# EAGLE board Schematic_1 (EAGLE 9.4.2)

Size 160 x 100 mm. Coordinates in mm from the lower left corner, seen from the top.
Outline: 0,0 160,0 160,100 0,100 0,0
Copper layers (1*16): Top 0.035mm / dielectric 1.5mm / Bottom 0.035mm
Design rules "default": minimum track width 6mil, minimum drill 0.35mm, track to track 6mil, track to pad 6mil, pad to pad 6mil, via to via 6mil, smd to smd 6mil, copper to edge 40mil, drill to drill 6mil, minimum pad ring 10mil, minimum via ring 8mil, stop-mask expansion 4mil, vias tented up to drill 0mil, thermal gap 10mil

## Footprints (pad centres in the part's own frame; a part is rotated, then mirrored left to right if it is on the bottom)
C2.5-3 = drill 0.813 pad 1.6 octagon: 1 -1.27,0; 2 1.27,0
SOD80C = smd 1.4 x 1.8: A 1.7,0; C -1.7,0
GCT_USB4085-GF-A_REVA = drill 0.4 pad 0.65: A1 -2.975,4.025; A4 -2.125,4.025; A5 -1.275,4.025; A6 -0.425,4.025; A7 0.425,4.025; A8 1.275,4.025; A9 2.125,4.025; A12 2.975,4.025; B1 2.975,2.675; B4 2.125,2.675; B5 1.275,2.675; B6 0.425,2.675; B7 -0.425,2.675; B8 -1.275,2.675; B9 -2.125,2.675; B12 -2.975,2.675 | drill 0.6 long: P1 -4.325,3.045; P2 4.325,3.045; P3 4.325,-0.335; P4 -4.325,-0.335
LQFP48-7X7MM = smd 1.194 x 0.305: 1 -4.25,2.75; 2 -4.25,2.25; 3 -4.25,1.75; 4 -4.25,1.25; 5 -4.25,0.75; 6 -4.25,0.25; 7 -4.25,-0.25; 8 -4.25,-0.75; 9 -4.25,-1.25; 10 -4.25,-1.75; 11 -4.25,-2.25; 12 -4.25,-2.75; 25 4.25,-2.75; 26 4.25,-2.25; 27 4.25,-1.75; 28 4.25,-1.25; 29 4.25,-0.75; 30 4.25,-0.25; 31 4.25,0.25; 32 4.25,0.75; 33 4.25,1.25; 34 4.25,1.75; 35 4.25,2.25; 36 4.25,2.75 | smd 0.305 x 1.194: 13 -2.75,-4.25; 14 -2.25,-4.25; 15 -1.75,-4.25; 16 -1.25,-4.25; 17 -0.75,-4.25; 18 -0.25,-4.25; 19 0.25,-4.25; 20 0.75,-4.25; 21 1.25,-4.25; 22 1.75,-4.25; 23 2.25,-4.25; 24 2.75,-4.25; 37 2.75,4.25; 38 2.25,4.25; 39 1.75,4.25; 40 1.25,4.25; 41 0.75,4.25; 42 0.25,4.25; 43 -0.25,4.25; 44 -0.75,4.25; 45 -1.25,4.25; 46 -1.75,4.25; 47 -2.25,4.25; 48 -2.75,4.25
CHERRY-MX-LED = drill 1.016 pad 1.778: LED+ -1.27,-5.08; LED- 1.27,-5.08 | drill 1.714 pad 1.93: P$3 -5.08,0; P$4 5.08,0 | drill 1.524 pad 2.286: SW1 -3.81,2.54; SW2 2.54,5.08 | hole 4.064: 0,0

## Placement (x,y rotation side)
C1  100 nF  [C2.5-3]  -96.52,-373.38 0 top  (outside the outline)
C2  100 nF  [C2.5-3]  -96.52,-379.73 0 top  (outside the outline)
C3  4.7 mF  [C2.5-3]  -96.52,-386.08 0 top  (outside the outline)
C4  100 nF  [C2.5-3]  -96.52,-393.7 0 top  (outside the outline)
C5  4.7 mF  [C2.5-3]  -96.52,-401.32 0 top  (outside the outline)
C6  10 nF  [C2.5-3]  -96.52,-408.94 0 top  (outside the outline)
C7  1 mF  [C2.5-3]  -96.52,-416.56 0 top  (outside the outline)
D1  [SOD80C]  -96.52,-15.24 0 top  (outside the outline)
D2  [SOD80C]  -96.52,-20.32 0 top  (outside the outline)
D3  [SOD80C]  -96.52,-25.4 0 top  (outside the outline)
D4  [SOD80C]  -96.52,-30.48 0 top  (outside the outline)
D5  [SOD80C]  -96.52,-53.34 0 top  (outside the outline)
D6  [SOD80C]  -96.52,-76.2 0 top  (outside the outline)
D7  [SOD80C]  -63.5,-116.84 0 top  (outside the outline)
D8  [SOD80C]  -58.42,-116.84 0 top  (outside the outline)
D9  [SOD80C]  -96.52,-134.62 0 top  (outside the outline)
D10  [SOD80C]  -91.44,-134.62 0 top  (outside the outline)
D11  [SOD80C]  -86.36,-134.62 0 top  (outside the outline)
D12  [SOD80C]  -81.28,-134.62 0 top  (outside the outline)
D13  [SOD80C]  -63.5,-175.26 0 top  (outside the outline)
D14  [SOD80C]  -58.42,-175.26 0 top  (outside the outline)
D15  [SOD80C]  -96.52,-193.04 0 top  (outside the outline)
D16  [SOD80C]  -91.44,-193.04 0 top  (outside the outline)
D17  [SOD80C]  -86.36,-193.04 0 top  (outside the outline)
D18  [SOD80C]  -81.28,-193.04 0 top  (outside the outline)
D19  [SOD80C]  -63.5,-233.68 0 top  (outside the outline)
D20  [SOD80C]  -58.42,-233.68 0 top  (outside the outline)
D21  [SOD80C]  -96.52,-251.46 0 top  (outside the outline)
D22  [SOD80C]  -91.44,-251.46 0 top  (outside the outline)
D23  [SOD80C]  -86.36,-251.46 0 top  (outside the outline)
D24  [SOD80C]  -81.28,-251.46 0 top  (outside the outline)
D25  [SOD80C]  -63.5,-292.1 0 top  (outside the outline)
D26  [SOD80C]  -58.42,-292.1 0 top  (outside the outline)
D27  [SOD80C]  -96.52,-309.88 0 top  (outside the outline)
D28  [SOD80C]  -91.44,-309.88 0 top  (outside the outline)
D29  [SOD80C]  -86.36,-309.88 0 top  (outside the outline)
D30  [SOD80C]  -81.28,-309.88 0 top  (outside the outline)
D31  [SOD80C]  -63.5,-350.52 0 top  (outside the outline)
D32  [SOD80C]  -58.42,-350.52 0 top  (outside the outline)
D33  [SOD80C]  -96.52,-368.3 0 top  (outside the outline)
D34  [SOD80C]  -91.44,-368.3 0 top  (outside the outline)
D35  [SOD80C]  -86.36,-368.3 0 top  (outside the outline)
D36  [SOD80C]  -81.28,-368.3 0 top  (outside the outline)
J1  USB4085-GF-A_REVA  [GCT_USB4085-GF-A_REVA]  -27.94,7.62 0 top  (outside the outline)
U1  STM32F0XXC2T  [LQFP48-7X7MM]  -26.67,-6.35 0 top  (outside the outline)
U$1  CHERRY-MX-LED  [CHERRY-MX-LED]  -41.91,-3.81 0 top  (outside the outline)
U$2  CHERRY-MX-LED  [CHERRY-MX-LED]  -58.42,-3.81 0 top  (outside the outline)
U$3  CHERRY-MX-LED  [CHERRY-MX-LED]  -74.93,-3.81 0 top  (outside the outline)
U$4  CHERRY-MX-LED  [CHERRY-MX-LED]  -91.44,-3.81 0 top  (outside the outline)
U$5  CHERRY-MX-LED  [CHERRY-MX-LED]  -91.44,-41.91 0 top  (outside the outline)
U$6  CHERRY-MX-LED  [CHERRY-MX-LED]  -91.44,-64.77 0 top  (outside the outline)
U$7  CHERRY-MX-LED  [CHERRY-MX-LED]  -91.44,-87.63 0 top  (outside the outline)
U$8  CHERRY-MX-LED  [CHERRY-MX-LED]  -74.93,-87.63 0 top  (outside the outline)
U$9  CHERRY-MX-LED  [CHERRY-MX-LED]  -91.44,-105.41 0 top  (outside the outline)
U$10  CHERRY-MX-LED  [CHERRY-MX-LED]  -74.93,-105.41 0 top  (outside the outline)
U$11  CHERRY-MX-LED  [CHERRY-MX-LED]  -91.44,-123.19 0 top  (outside the outline)
U$12  CHERRY-MX-LED  [CHERRY-MX-LED]  -74.93,-123.19 0 top  (outside the outline)
U$13  CHERRY-MX-LED  [CHERRY-MX-LED]  -91.44,-146.05 0 top  (outside the outline)
U$14  CHERRY-MX-LED  [CHERRY-MX-LED]  -74.93,-146.05 0 top  (outside the outline)
U$15  CHERRY-MX-LED  [CHERRY-MX-LED]  -91.44,-163.83 0 top  (outside the outline)
U$16  CHERRY-MX-LED  [CHERRY-MX-LED]  -74.93,-163.83 0 top  (outside the outline)
U$17  CHERRY-MX-LED  [CHERRY-MX-LED]  -91.44,-181.61 0 top  (outside the outline)
U$18  CHERRY-MX-LED  [CHERRY-MX-LED]  -74.93,-181.61 0 top  (outside the outline)
U$19  CHERRY-MX-LED  [CHERRY-MX-LED]  -91.44,-204.47 0 top  (outside the outline)
U$20  CHERRY-MX-LED  [CHERRY-MX-LED]  -74.93,-204.47 0 top  (outside the outline)
U$21  CHERRY-MX-LED  [CHERRY-MX-LED]  -91.44,-222.25 0 top  (outside the outline)
U$22  CHERRY-MX-LED  [CHERRY-MX-LED]  -74.93,-222.25 0 top  (outside the outline)
U$23  CHERRY-MX-LED  [CHERRY-MX-LED]  -91.44,-240.03 0 top  (outside the outline)
U$24  CHERRY-MX-LED  [CHERRY-MX-LED]  -74.93,-240.03 0 top  (outside the outline)
U$25  CHERRY-MX-LED  [CHERRY-MX-LED]  -91.44,-262.89 0 top  (outside the outline)
U$26  CHERRY-MX-LED  [CHERRY-MX-LED]  -74.93,-262.89 0 top  (outside the outline)
U$27  CHERRY-MX-LED  [CHERRY-MX-LED]  -91.44,-280.67 0 top  (outside the outline)
U$28  CHERRY-MX-LED  [CHERRY-MX-LED]  -74.93,-280.67 0 top  (outside the outline)
U$29  CHERRY-MX-LED  [CHERRY-MX-LED]  -91.44,-298.45 0 top  (outside the outline)
U$30  CHERRY-MX-LED  [CHERRY-MX-LED]  -74.93,-298.45 0 top  (outside the outline)
U$31  CHERRY-MX-LED  [CHERRY-MX-LED]  -91.44,-321.31 0 top  (outside the outline)
U$32  CHERRY-MX-LED  [CHERRY-MX-LED]  -74.93,-321.31 0 top  (outside the outline)
U$33  CHERRY-MX-LED  [CHERRY-MX-LED]  -91.44,-339.09 0 top  (outside the outline)
U$34  CHERRY-MX-LED  [CHERRY-MX-LED]  -74.93,-339.09 0 top  (outside the outline)
U$35  CHERRY-MX-LED  [CHERRY-MX-LED]  -91.44,-356.87 0 top  (outside the outline)
U$36  CHERRY-MX-LED  [CHERRY-MX-LED]  -74.93,-356.87 0 top  (outside the outline)

## Library data of the parts
C1-C7 = capacitor-wima
D1-D36 = diode
J1 = USB4085-GF-A_REVA; AVAILABILITY: Unavailable; MF: Global Connector Technology; MP: USB4085-GF-A; PACKAGE: Package Analog Devices; PRICE: None
U1 = STM32F0XXC2T; MANUFACTURER_PART_NUMBER: STM32F0XXC2T; VENDOR: STMicroelectronics
U$1-U$36 = cherrymx

## Nets
COL1: D1.C D2.C D3.C D4.C D5.C D6.C U1.41
COL2: D7.C D8.C D9.C D10.C D11.C D12.C U1.40
COL3: D13.C D14.C D15.C D16.C D17.C D18.C U1.39
COL4: D19.C D20.C D21.C D22.C D23.C D24.C U1.20
COL5: D25.C D26.C D27.C D28.C D29.C D30.C U1.19
COL6: D31.C D32.C D33.C D34.C D35.C D36.C U1.18
N$1: D2.A U$1.SW2
N$2: D1.A U$3.SW2
N$3: D3.A U$4.SW2
N$4: D6.A U$6.SW2
N$5: D8.A U$7.SW2
N$6: D4.A U$2.SW2
N$7: D5.A U$5.SW2
N$8: D7.A U$9.SW2
N$9: D9.A U$10.SW2
N$10: D10.A U$8.SW2
N$11: D11.A U$11.SW2
N$12: D12.A U$12.SW2
N$13: D14.A U$13.SW2
N$14: D13.A U$15.SW2
N$15: D15.A U$16.SW2
N$16: D16.A U$14.SW2
N$17: D17.A U$17.SW2
N$18: D18.A U$18.SW2
N$19: D20.A U$19.SW2
N$20: D19.A U$21.SW2
N$21: D21.A U$22.SW2
N$22: D22.A U$20.SW2
N$23: D23.A U$23.SW2
N$24: D24.A U$24.SW2
N$25: D26.A U$25.SW2
N$26: D25.A U$27.SW2
N$27: D27.A U$28.SW2
N$28: D28.A U$26.SW2
N$29: D29.A U$29.SW2
N$30: D30.A U$30.SW2
N$31: D32.A U$31.SW2
N$32: D31.A U$33.SW2
N$33: D33.A U$34.SW2
N$34: D34.A U$32.SW2
N$35: D35.A U$35.SW2
N$36: D36.A U$36.SW2
N$37: C1.1 C4.2 C6.2 J1.A4 J1.A9 J1.B4 J1.B9 U1.9 U1.24 U1.36
N$39: C2.2 C3.1
N$40: C1.2 C2.1
N$41: C3.2 C5.1 C7.1 J1.A1 J1.A12 J1.B1 J1.B12 U1.8 U1.47 U1.48
N$43: C4.1 C5.2
N$45: C6.1 C7.2
ROW1: U1.42 U$1.SW1 U$7.SW1 U$13.SW1
ROW2: U1.43 U$3.SW1 U$9.SW1 U$15.SW1
ROW3: U1.45 U$4.SW1 U$10.SW1 U$16.SW1
ROW4: U1.46 U$2.SW1 U$8.SW1 U$14.SW1
ROW5: U1.21 U$5.SW1 U$11.SW1 U$17.SW1
ROW6: U1.22 U$6.SW1 U$12.SW1 U$18.SW1
ROW13: U$19.SW1
ROW14: U$21.SW1
ROW15: U$22.SW1
ROW16: U$20.SW1
ROW17: U$23.SW1
ROW18: U$24.SW1
ROW19: U$25.SW1
ROW20: U$27.SW1
ROW21: U$28.SW1
ROW22: U$26.SW1
ROW23: U$29.SW1
ROW24: U$30.SW1
ROW25: U$31.SW1
ROW26: U$33.SW1
ROW27: U$34.SW1
ROW28: U$32.SW1
ROW29: U$35.SW1
ROW30: U$36.SW1
VBAT: U1.1
VSS_2: U1.23
VSS_3: U1.35

## Tracks (layer width: path | path; a pad name or v marks a point on that pad's centre or on a via)
COL1  (6 unrouted)
COL2  (6 unrouted)
COL3  (6 unrouted)
COL4  (6 unrouted)
COL5  (6 unrouted)
COL6  (6 unrouted)
N$1  (1 unrouted)
N$2  (1 unrouted)
N$3  (1 unrouted)
N$4  (1 unrouted)
N$5  (1 unrouted)
N$6  (1 unrouted)
N$7  (1 unrouted)
N$8  (1 unrouted)
N$9  (1 unrouted)
N$10  (1 unrouted)
N$11  (1 unrouted)
N$12  (1 unrouted)
N$13  (1 unrouted)
N$14  (1 unrouted)
N$15  (1 unrouted)
N$16  (1 unrouted)
N$17  (1 unrouted)
N$18  (1 unrouted)
N$19  (1 unrouted)
N$20  (1 unrouted)
N$21  (1 unrouted)
N$22  (1 unrouted)
N$23  (1 unrouted)
N$24  (1 unrouted)
N$25  (1 unrouted)
N$26  (1 unrouted)
N$27  (1 unrouted)
N$28  (1 unrouted)
N$29  (1 unrouted)
N$30  (1 unrouted)
N$31  (1 unrouted)
N$32  (1 unrouted)
N$33  (1 unrouted)
N$34  (1 unrouted)
N$35  (1 unrouted)
N$36  (1 unrouted)
N$37  (9 unrouted)
N$39  (1 unrouted)
N$40  (1 unrouted)
N$41  (9 unrouted)
N$43  (1 unrouted)
N$45  (1 unrouted)
ROW1  (3 unrouted)
ROW2  (3 unrouted)
ROW3  (3 unrouted)
ROW4  (3 unrouted)
ROW5  (3 unrouted)
ROW6  (3 unrouted)